# Altium PCB Final_Project.PcbDoc
Units mil, origin at the board's own origin, x right, y up, seen from the top; angles counter-clockwise.
Board outline 2702.01 x 2105 mil, 2 copper layers (Top Layer, Bottom Layer); 73 components, 55 nets, 229 pads, 105 vias.
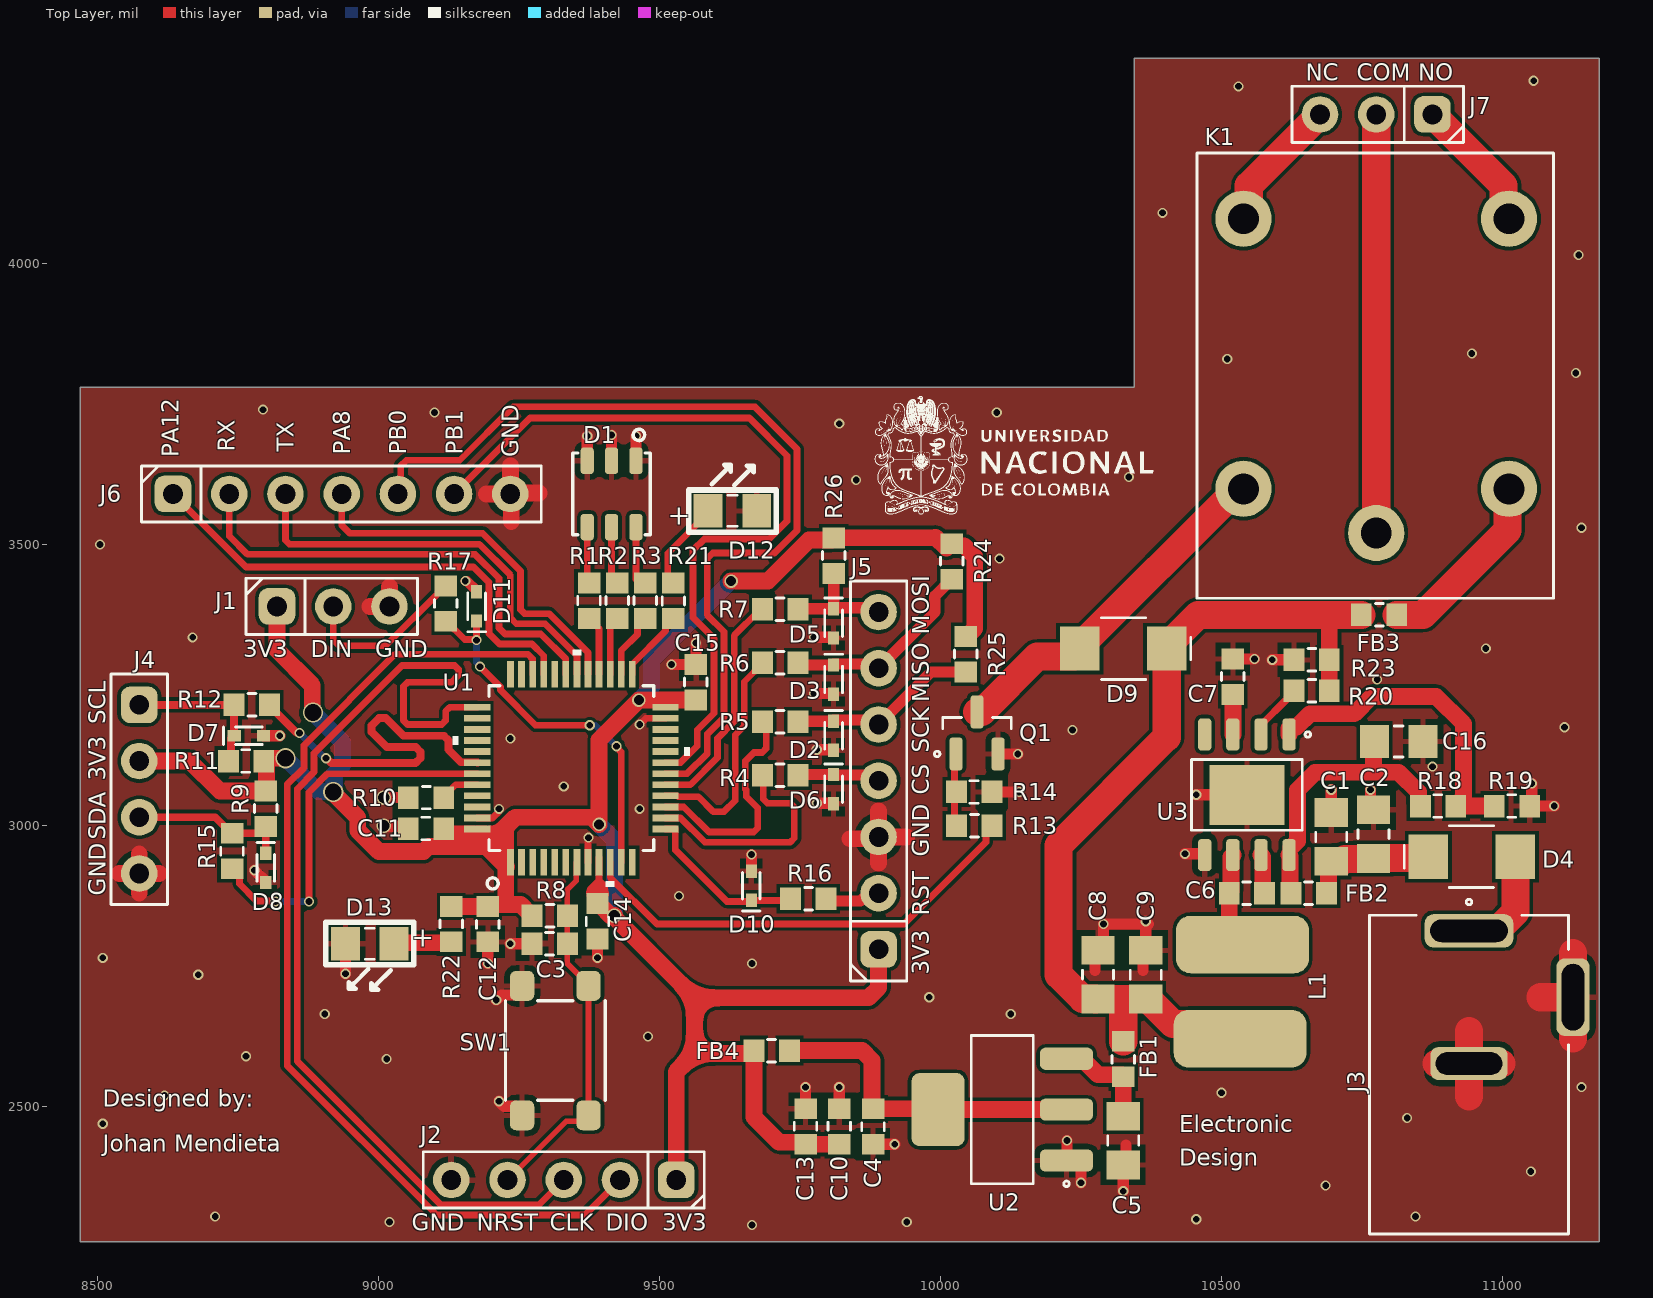
[diagram p0: Top Layer view]
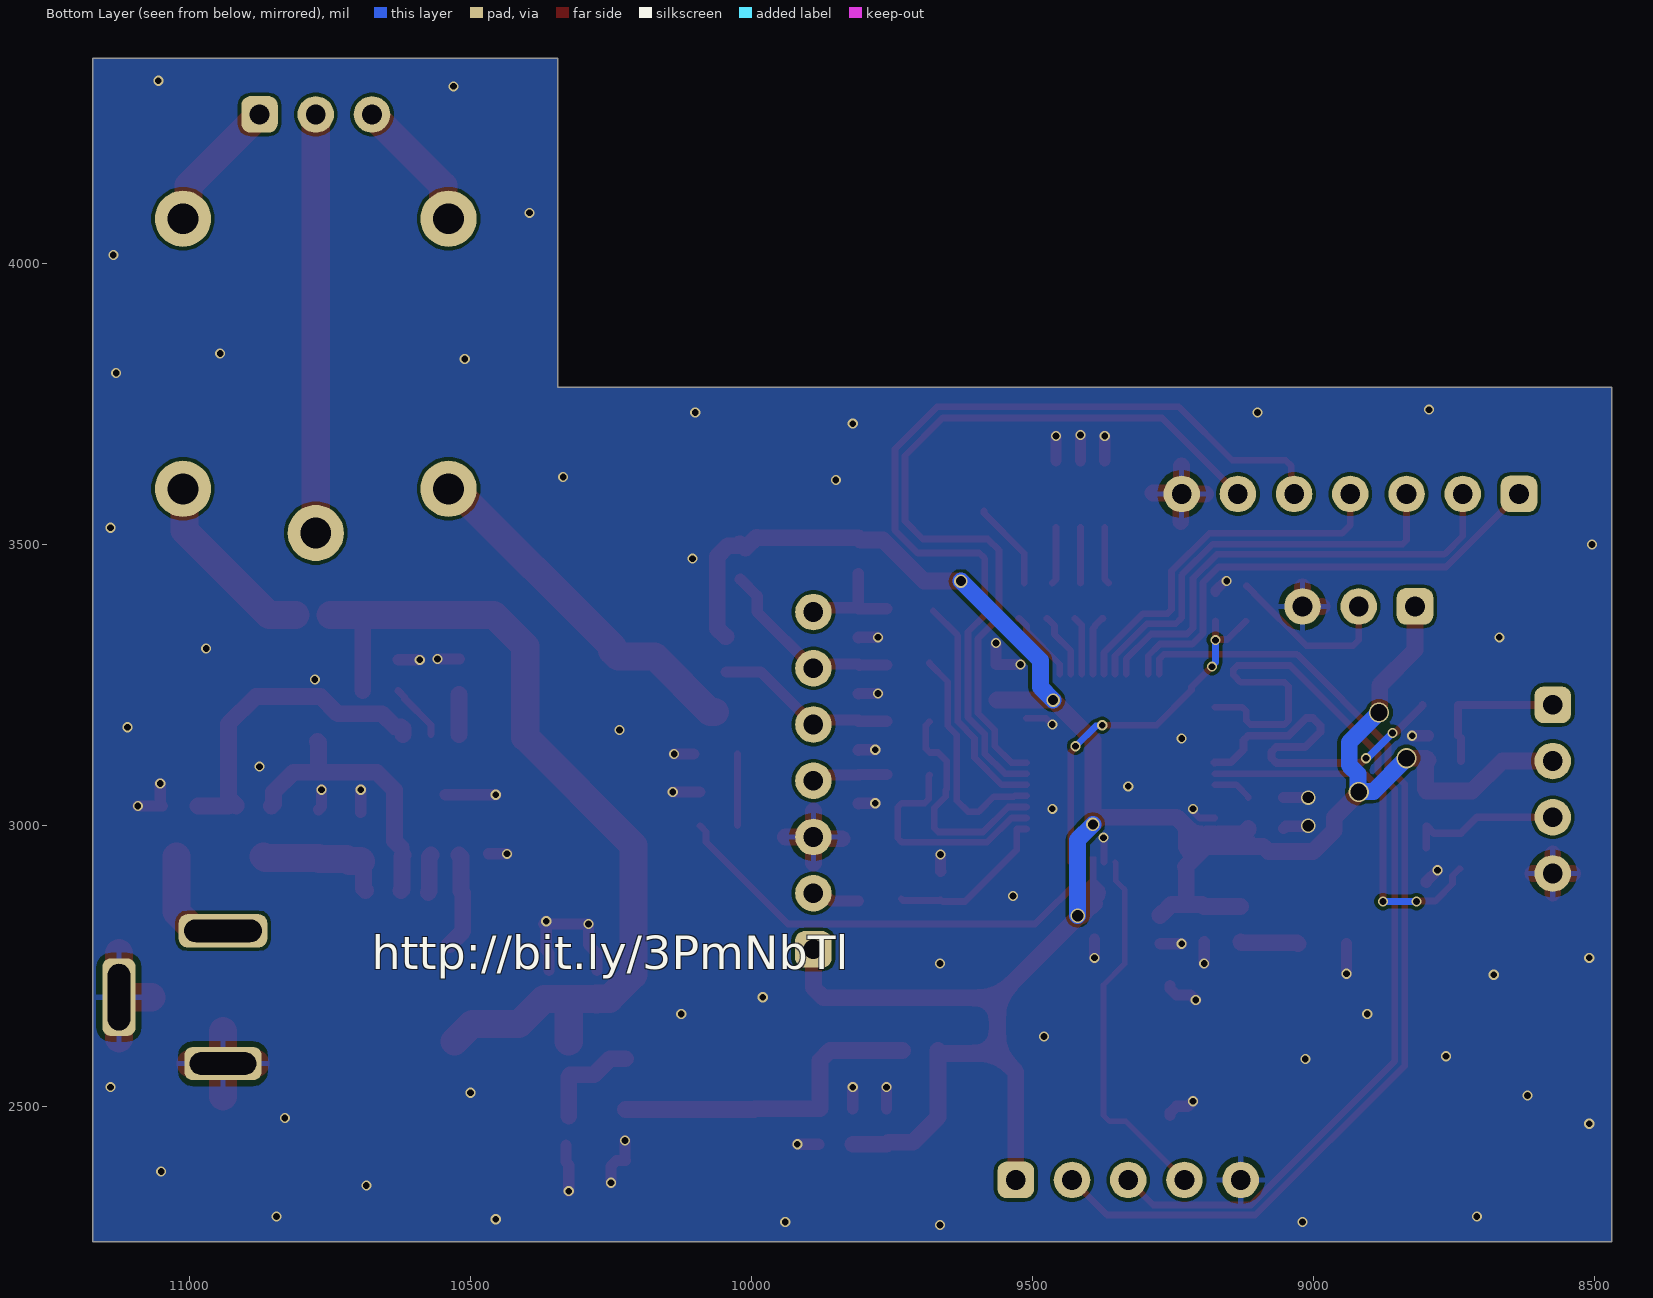
[diagram p1: Bottom Layer view, seen from below]
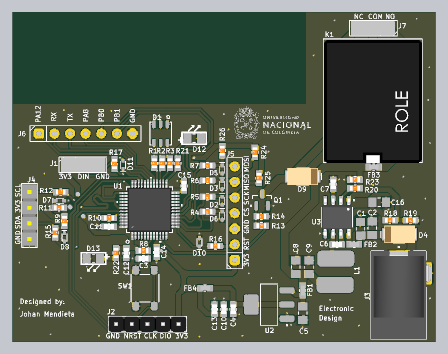
[diagram p2: 3D render of the assembled board from above, using the file's embedded part models]

## Layer stack, top to bottom
Top Solder: solder mask 0.4, Solder Resist, Dk 3.5
Top Layer: signal copper 1.4
Dielectric 1: dielectric 12.6, FR-4, Dk 4.8
Bottom Layer: signal copper 1.4
Bottom Solder: solder mask 0.4, Solder Resist, Dk 3.5

## Board outline
8470,2260 8470,3780 10345,3780 10345,4365 11172.01,4365 11172.01,2260

## Design rules (kind name [scope] priority, off if disabled: settings)
AcuteAngle [All] p1: minimum=7.00000000000000E+0001 checktracksonly=FALSE
Clearance [All] p1: gap=6 ignorepadtopadclearanceinfootprint=FALSE
HoleSize [All] p1: absolutevalues=TRUE maxlimit=200 minlimit=12 maxpercent=80.000 minpercent=20.000
MinimumSolderMaskSliver [All] p1: minsoldermaskwidth=4
PolygonConnect [All] p1: thpad.connectstyle=Relief thpad.reliefconductorwidth=10 thpad.reliefentries=4 thpad.polygonreliefangle="90 Angle" thpad.airgapwidth=10 smdpad.connectstyle=Relief smdpad.reliefconductorwidth=10 smdpad.reliefentries=4 smdpad.polygonreliefangle="90 Angle" smdpad.airgapwidth=10 via.connectstyle=Direct via.reliefconductorwidth=10 via.reliefentries=4 via.polygonreliefangle="90 Angle" via.airgapwidth=10
RoutingVias [All] p1: holewidth=12 width=18 viastyle="Through Hole" minholewidth=12 minwidth=18 maxholewidth=30 maxwidth=50
SilkToSilkClearance [All] p1: silktosilkclearance=2
SilkToSolderMaskClearance [IsPad] p1: minsilkscreentomaskgap=0.1 clearancetoexposedcopper=TRUE
SolderMaskExpansion [All] p1: expansion=2 istentingtop=FALSE
SupplyNets "Schematic Supply Nets_1" [InNet('12V')] p1: voltage=0.000
SupplyNets "Schematic Supply Nets_4" [InNet('GND')] p2: voltage=0.000
SupplyNets "Schematic Supply Nets_3" [InNet('3.3V_MCU')] p3: voltage=0.000
SupplyNets "Schematic Supply Nets_2" [InNet('3.3V')] p4: voltage=0.000
SupplyNets "Schematic Supply Nets" [InNet('5V')] p5: voltage=0.000
UnRoutedNet [All] p1: checkbadconnections=TRUE
Width Width_Filtered_Power [InNet('3.3V_MCU')] p1: maxlimit=100 minlimit=10 preferedwidth=30
Width Width_Power [InNet('VIN') or InNet('3.3V') or InNet('5V')] p2: maxlimit=100 minlimit=30 preferedwidth=30 minimp=50.000000 maximp=50.000000 favimp=50.000000
Width [All] p3: maxlimit=100 minlimit=6 preferedwidth=10
25 further rules are at their usual default settings.

## Components (designator, comment, footprint, x,y, rotation, side; value= is the part's Value field where it differs from the comment)
C1 "10uF 25V" 0805_cap 10695,2980 r90 top value=10uF
C2 "10uF 25V" 0805_cap 10770,2985 r90 top value=10uF
C3 "0.1uF 50V" 0603_cap 9305,2790 r180 top value=0.1uF
C4 "22uF 10V" 0603_cap 9880,2465 r270 top value=22uF
C5 "10uF 25V" 0805_cap 10325,2440 r270 top value=10uF
C6 "0.1uF 50V" 0603_cap 10545,2880 r180 top value=0.1uF
C7 "10uF 10V" 0603_cap 10520,3265 r90 top value=10uF
C8 "22uF 16V" 0805_cap 10280,2735 r90 top value=22uF
C9 "22uF 16V" 0805_cap 10365,2735 r90 top value=22uF
C10 "1uF 50V" 0603_cap 9820,2465 r90 top value=1uF
C11 "0.1uF 50V" 0603_cap 9085,2995 r180 top value=0.1uF
C12 "0.1uF 50V" 0603_cap 9195,2825 r270 top value=0.1uF
C13 "0.1uF 50V" 0603_cap 9760,2465 r90 top value=0.1uF
C14 "0.1uF 50V" 0603_cap 9390,2830 r270 top value=0.1uF
C15 "0.1uF 50V" 0603_cap 9565,3255 r90 top value=0.1uF
C16 "10uF 25V" 0805_cap 10815,3150 r0 top value=10uF
D1 "RGB" RGB_NS_3.5X3.7 9415,3590 r270 top
D2 "TVS_3V3_1CH_SOD_523" SOD_523 9810,3160 r270 top
D3 "TVS_3V3_1CH_SOD_523" SOD_523 9810,3260 r270 top
D4 "30V 3A" SMA 10945,2945 r0 top
D5 "TVS_3V3_1CH_SOD_523" SOD_523 9810,3360 r270 top
D6 "TVS_3V3_1CH_SOD_523" SOD_523 9810,3065 r270 top
D7 "TVS_3V3_1CH_SOD_523" SOD_523 8770,3160 r0 top
D8 "TVS_3V3_1CH_SOD_523" SOD_523 8800,2925 r270 top
D9 "30V 3A" SMA 10325,3315 r180 top
D10 "TVS_3V3_1CH_SOD_523" SOD_523 9663.54,2893.17 r90 top
D11 "TVS_3V3_1CH_SOD_523" SOD_523 9175,3390 r90 top
D12 "2V" 0805_LED 9630,3560 r0 top
D13 "2.9V" 0805_LED 8985,2790 r180 top
FB1 "60OHM 2A" 0603_fb 10325,2585 r270 top value="60 OHM"
FB2 "60OHM 2A" 0603_fb 10655,2880 r180 top value="60 OHM"
FB3 "60OHM 2A" 0603_fb 10780,3375 r0 top value="60 OHM"
FB4 "60OHM 2A" 0603_fb 9700,2600 r180 top value="60 OHM"
J1 "3x1" H_3X1_TH_100mil 8920,3390 r0 top
J2 "5x1" H_5x1_TH_100mil 9330,2370 r180 top
J3 "PWR JACK 2.1mm" CON_POWER_BARREL_2.1MM_3CONN 10940,2695 r0 top
J4 "4x1" H_4x1_TH_2.54mm 8575,3065 r270 top
J5 "7x1" H_7x1_TH_100mil 9890,3080 r90 top
J6 "7x1" H_7x1_TH_100mil 8935,3590 r0 top
J7 "3x1" H_3X1_TH_100mil 10775,4265 r180 top
K1 "V_15A" Relay_5V_15A 10775,3800 r90 top
L1 "2.2uH 4A" Ind_5.8*5.2_NS 10535,2705 r270 top value=2.2uH
Q1 "N CH" SOT_23_3 10065,3165 r90 top
R1 "330R 1/10W" 0603_res 9375,3400 r90 top value=330R
R2 "100R 1/10W" 0603_res 9425,3400 r90 top value=100R
R3 "100R 1/10W" 0603_res 9475,3400 r90 top value=100R
R4 "330R 1/10W" 0603_res 9715,3090 r180 top value=330R
R5 "330R 1/10W" 0603_res 9715,3185 r180 top value=330R
R6 "330R 1/10W" 0603_res 9715,3290 r180 top value=330R
R7 "330R 1/10W" 0603_res 9715,3385 r180 top value=330R
R8 "10k 1/10W" 0603_res 9305,2840 r0 top value=10k
R9 "4k7 1/10W" 0603_res 8800,3030 r90 top value=4k7
R10 "10k 1/10W" 0603_res 9085,3050 r0 top value=10k
R11 "4k7 1/10W" 0603_res 8765,3115 r180 top value=4k7
R12 "330R 1/10W" 0603_res 8775,3215 r0 top value=330R
R13 "1k 1/10W" 0603_res 10060,3000 r0 top value=1k
R14 "10k 1/10W" 0603_res 10060,3060 r180 top value=10k
R15 "330R 1/10W" 0603_res 8740,2955 r270 top value=330R
R16 "330R 1/10W" 0603_res 9765,2870 r0 top value=330R
R17 "330R 1/10W" 0603_res 9120,3395 r90 top value=330R
R18 "365k 1/10W" 0603_res 10885,3035 r180 top value=365k
R19 "191k 1/10W" 0603_res 11016.5,3035 r180 top value=191k
R20 "73k2 1/10W" 0603_res 10660,3240 r0 top value=73k2
R21 "330R 1/10W" 0603_res 9525,3400 r270 top value=330R
R22 "84R5 1/10W" 0603_res 9130,2825 r90 top value=84R5
R23 "10k 1/10W" 0603_res 10660,3295 r0 top value=10k
R24 "4k7 1/10W" 0603_res 10020,3470 r90 top value=4k7
R25 "4k7 1/10W" 0603_res 10045,3305 r90 top value=4k7
R26 "4k7 1/10W" 0603_res 9810,3480 r90 top value=4k7
SW1 "Sw" Sw_PUSH_4.5x4.5x5mm 9315,2600 r270 top
U1 "STM32F030C8T6TR" LQFP48_7x7mm 9343.58,3102.32 r90 top
U2 "AMS1117-3.3" SOT_223 10110,2495 r180 top
U3 "TPS56528DDAR" SOIC_8_3.9mm_EP 10545,3055 r270 top

## Footprints (in the part's own frame and the unit in brackets; to place one, negate y for a bottom-side part, rotate by r counter-clockwise, add the part's x,y. Pads: shape width x height; smd on the part's side, far side on the other; paste and mask are expansions set on the pad)
0603_cap [mil]
  rect 37x40 smd: 1(-31.5,0) 2(31.5,0)
  silkscreen extent -7,-20 8,20, body extent -31,-17 31,17, height 34
0603_fb [mil]
  rect 37x40 smd: 1(-31.5,0) 2(31.5,0)
  silkscreen extent -7,-20 8,20, body extent -32,-16 31,16, height 32
0603_res [mil] "1608 Metric / 20190225 / C-A.Serna.A"
  rect 37x40 smd: 1(-31.5,0) 2(31.5,0)
  silkscreen extent -7,-20 8,20, body extent -31,-16 32,16, height 12
0805_cap [mm]
  rect 1.3x1.5 smd: 1(-1.1,0) 2(1.1,0)
  silkscreen extent -0.2,-0.7 0.2,0.7, body extent -1.13,-0.7 1.07,0.7, height 1
0805_LED [mm]
  rect 1.3x1.5 smd: 1(-1.1,0) 2(1.1,0)
  silkscreen extent -1.98,-0.97 1.98,2.07, body extent -1,-0.62 1,0.63, height 1.1
CON_POWER_BARREL_2.1MM_3CONN [mm]
  rrect50% 4x1.5 hole 1.016 slot 3.5 at 0 deg: 1(0,3)
  rrect50% 3.5x1.5 hole 1.016 slot 3 at 0 deg: 2(0,-3)
  rrect50% 1.5x3.5 hole 1.016 slot 3 at 90 deg: 3(4.7,0)
  silkscreen extent -4.5,-10.7 4.5,4.42, body extent -4.5,-10.7 4.9,3.7, height 11
H_3X1_TH_100mil [mil]
  rrect50% 65x65 hole 35: 1(-100,0)
  round 65 hole 35: 2(0,0) 3(100,0)
  silkscreen extent -155,-50 150,50, body extent -142,-46 142,46, height 320
H_4x1_TH_2.54mm [mil]
  rrect50% 65x65 hole 35: 1(-150,0)
  round 65 hole 35: 2(-50,0) 3(50,0) 4(150,0)
  silkscreen extent -205,-50 205,50, body extent -200,-50 205,50, height 420
H_5x1_TH_100mil [mil]
  rrect50% 65x65 hole 35: 1(-200,0)
  round 65 hole 35: 2(-100,0) 3(0,0) 4(100,0) 5(200,0)
  silkscreen extent -250,-50 250,50, body extent -250,-49 250,49, height 335
H_7x1_TH_100mil [mil]
  rrect50% 65x65 hole 35: 1(-300,0)
  round 65 hole 35: 2(-200,0) 3(-100,0) 4(0,0) 5(100,0) 6(200,0) 7(300,0)
  silkscreen extent -356,-50 355,50
Ind_5.8*5.2_NS [mm]
  rrect50% 2.6x6 smd: 1(-2.125,0.053) 2(2.125,-0.053)
  body extent -3,-2.75 3,2.75, height 4.5
LQFP48_7x7mm [mil]
  rect 47x12 smd paste+0 mask+1.8: 1(-167.32,108.27) 2(-167.32,88.58) 3(-167.32,68.9) 4(-167.32,49.21) 5(-167.32,29.53) 6(-167.32,9.84) 7(-167.32,-9.84) 8(-167.32,-29.53) 9(-167.32,-49.21) 10(-167.32,-68.9) 11(-167.32,-88.58) 12(-167.32,-108.27) 25(167.32,-108.27) 26(167.32,-88.58) 27(167.32,-68.9) 28(167.32,-49.21) 29(167.32,-29.53) 30(167.32,-9.84) 31(167.32,9.84) 32(167.32,29.53) 33(167.32,49.21) 34(167.32,68.9) 35(167.32,88.58) 36(167.32,108.27)
  rect 12x47 smd paste+0 mask+1.8: 13(-108.27,-167.32) 14(-88.58,-167.32) 15(-68.9,-167.32) 16(-49.21,-167.32) 17(-29.53,-167.32) 18(-9.84,-167.32) 19(9.84,-167.32) 20(29.53,-167.32) 21(49.21,-167.32) 22(68.9,-167.32) 23(88.58,-167.32) 24(108.27,-167.32) 37(108.27,167.32) 38(88.58,167.32) 39(68.9,167.32) 40(49.21,167.32) 41(29.53,167.32) 42(9.84,167.32) 43(-9.84,167.32) 44(-29.53,167.32) 45(-49.21,167.32) 46(-68.9,167.32) 47(-88.58,167.32) 48(-108.27,167.32)
  silkscreen extent -215,-211 211,211, body extent -177,-177 177,177, height 63
Relay_5V_15A [mm]
  round 2.54 hole 1.397: 1(-7.1,0) 2(-5.1,-6) 3(7.1,-6) 4(7.1,6) 5(-5.1,6)
  silkscreen extent -10.04,-8.01 10.07,8.1, body extent -10.1,-8 9.9,8, height 15.02
RGB_NS_3.5X3.7 [mm]
  rrect50% 1.2x0.6 smd: 1(-1.5,1.1) 2(-1.5,0) 3(-1.5,-1.1) 4(1.5,-1.1) 5(1.5,0) 6(1.5,1.1)
  silkscreen extent -2.92,-1.75 1.85,1.75, body extent -1.85,-1.74 1.85,1.75, height 1
SMA [mm]
  rect 1.8x2 smd: 1(-1.965,0) 2(1.965,0)
  silkscreen extent -3.05,-1.4 0.98,1.4, body extent -2.64,-1.4 2.64,1.4, height 2.34
SOD_523 [mm]
  rect 0.6x0.5 smd: 1(-0.66,0) 2(0.66,0)
  silkscreen extent -1.14,-0.4 0.6,0.4, body extent -0.6,-0.4 0.6,0.4, height 0.6
SOIC_8_3.9mm_EP [mm]
  rrect50% 1.45x0.6 smd: 1(-2.725,1.905) 2(-2.725,0.635) 3(-2.725,-0.635) 4(-2.725,-1.905) 5(2.725,-1.905) 6(2.725,-0.635) 7(2.725,0.635) 8(2.725,1.905)
  rect 2.71x3.4 smd: 9(0,0)
  silkscreen extent -2.85,-2.5 1.6,2.88, body extent -3,-2.45 3,2.45, height 1.7
SOT_23_3 [mm]
  rrect50% 1.5x0.6 smd: 1(-0.95,0.95) 2(-0.95,-0.95) 3(0.95,0)
  silkscreen extent -1.07,-1.55 0.7,1.92, body extent -0.7,-1.52 0.7,1.53, height 1.12
SOT_223 [mm]
  rrect50% 2.4x1 smd: 1(-2.9,2.3) 2(-2.9,0) 3(-2.9,-2.3)
  rrect30% 2.4x3.3 smd: 4(2.9,0)
  silkscreen extent -3.03,-3.35 1.4,3.47, body extent -1.86,-3.35 1.86,3.35, height 1.8
Sw_PUSH_4.5x4.5x5mm [mm]
  rrect50% 1.35x1.1 smd: 1(-2.925,1.5) 1(2.925,1.5) 2(-2.925,-1.5) 2(2.925,-1.5)
  silkscreen extent -2.25,-2.25 2.25,2.25, body extent -2.25,-2.25 2.25,2.25, height 5

## Part data
C1 C2 C5 C16: library part Cap_10uF_0805_25V_, "25V 10uF X5R ±10% 0805 Multilayer Ceramic Capacitors MLCC - SMD/SMT ROHS", Manufacturer="Samsung Electro-Mechanics", Manufacturer Part Number=CL21A106KAYNNNE, Supplier Part Number 1=C15850, ComponentLink1Description=LCSC, ComponentLink1URL=https://lcsc.com/product-detail/Multilayer-Ceramic-Capacitors-MLCC-SMD-SMT_Samsung-Electro-Mechanics-CL21A106KAYNNNE_C15850.html, Supplier 1=LCSC
C3 C6 C11 C12 C13 C14 C15: library part Cap_0.1uF_0603_50V, "50V 100nF Y5V -20%~+80% 0603 Multilayer Ceramic Capacitors MLCC - SMD/SMT ROHS", Manufacturer="Walsin Tech Corp", Manufacturer Part Number=0603F104Z500CT, Supplier Part Number 1=C83060, ComponentLink1Description=LCSC, ComponentLink1URL=https://www.lcsc.com/product-detail/Multilayer-Ceramic-Capacitors-MLCC-SMD-SMT_Walsin-Tech-Corp-0603F104Z500CT_C83060.html, Supplier 1=LCSC
C4: library part Cap_22uF_0603_10V, "10V 22uF X5R ±20% 0603 Multilayer Ceramic Capacitors MLCC - SMD/SMT ROHS", Manufacturer=HRE, Manufacturer Part Number=CGA0603X5R226M100JT, Supplier Part Number 1=C6119863, ComponentLink1Description=LCSC, ComponentLink1URL=https://lcsc.com/product-detail/Multilayer-Ceramic-Capacitors-MLCC-SMD-SMT_HRE-CGA0603X5R226M100JT_C6119863.html, Supplier 1=LCSC
C7: library part Cap_10uF_0603_10V, "10V 10uF X5R ±10% 0603 Multilayer Ceramic Capacitors MLCC - SMD/SMT ROHS", Manufacturer=CCTC, Manufacturer Part Number=TCC0603X5R106K100CT, Supplier Part Number 1=C380314, ComponentLink1Description=LCSC, ComponentLink1URL=https://www.lcsc.com/product-detail/Multilayer-Ceramic-Capacitors-MLCC-SMD-SMT_CCTC-TCC0603X5R106K100CT_C380314.html, Supplier 1=LCSC
C8 C9: library part Cap_22uF_0805_16V, "16V 22uF X5R ±20% 0805 Multilayer Ceramic Capacitors MLCC - SMD/SMT ROHS", Manufacturer=Chinocera, Manufacturer Part Number=HGC0805R5226M160NSLJ, Supplier Part Number 1=C33546008, ComponentLink1Description=LCSC, ComponentLink1URL=https://lcsc.com/product-detail/Multilayer-Ceramic-Capacitors-MLCC-SMD-SMT_Chinocera-HGC0805R5226M160NSLJ_C33546008.html, Supplier 1=LCSC
C10: library part Cap_1uF_0603_50V, "50V 1uF X5R ±10% 0603 Multilayer Ceramic Capacitors MLCC - SMD/SMT ROHS", Manufacturer="Samsung Electro-Mechanics", Manufacturer Part Number=CL10A105KB8NNNC, Supplier Part Number 1=C15849, ComponentLink1Description=LCSC, ComponentLink1URL=https://www.lcsc.com/product-detail/Multilayer-Ceramic-Capacitors-MLCC-SMD-SMT_Samsung-Electro-Mechanics-CL10A105KB8NNNC_C15849.html, Supplier 1=LCSC
D1: library part LED_RGB_3535_SMD, "-30℃~+85℃ RGB 110° 3535(mm) Light Emitting Diodes (LED) ROHS", Manufacturer="Foshan NationStar Optoelectronics", Manufacturer Part Number=RS-3535MWAM, Supplier Part Number 1=C842778, ComponentLink1Description=LCSC, ComponentLink1URL=https://www.lcsc.com/product-detail/Light-Emitting-Diodes-LED_Foshan-NationStar-Optoelectronics-RS-3535MWAM_C842778.html, Supplier 1=LCSC
D2 D3 D5 D6 D7 D8 D10 D11: "11.2A@8/20us 200W@8/20us 14.1V 5V Unidirectional 3.3V SOD-523 ESD and Surge Protection (TVS/ESD) ROHS", Manufacturer=LRC, Manufacturer Part Number=LESD5Z3.3T1G, Supplier Part Number 1=C136161, ComponentLink1Description=LCSC, ComponentLink1URL=https://lcsc.com/product-detail/ESD-and-Surge-Protection-TVS-ESD_LRC-LESD5Z3-3T1G_C136161.html, Supplier 1=LCSC
D4 D9: library part D_Schottky_40V_3A_SMA, "40V Independent 3A 550mV@3A SMA Schottky Diodes ROHS", Manufacturer=TDSEMIC, Manufacturer Part Number=SS34-TD, Supplier Part Number 1=C46550832, ComponentLink1Description=LCSC, ComponentLink1URL=https://lcsc.com/product-detail/Schottky-Diodes_TDSEMIC-SS34-TD_C46550832.html, Supplier 1=LCSC
D12: library part LED_0805_RED, "LED RED CLEAR 0805 SMD", Manufacturer=XINGLIGHT, Manufacturer Part Number=XL-2012SURC, Supplier Part Number 1=C965812, ComponentLink1Description=LCSC, ComponentLink1URL=https://www.lcsc.com/product-detail/Light-Emitting-Diodes-LED_XINGLIGHT-XL-2012SURC_C965812.html, Supplier 1=LCSC
D13: library part LED_0805_Green, "LED GREEN CLEAR 0805 SMD", Manufacturer=XINGLIGHT, Manufacturer Part Number=XL-2012UGC, Supplier Part Number 1=C965815, ComponentLink1Description=LCSC, ComponentLink1URL=https://www.lcsc.com/product-detail/Light-Emitting-Diodes-LED_XINGLIGHT-XL-2012UGC_C965815.html, Supplier 1=LCSC
FB1 FB2 FB3 FB4: library part FB_60_0603_2A, "2A 1 100mΩ 60Ω@100MHz ±25% 0603 Ferrite Beads ROHS", Manufacturer=TAI-TECH, Manufacturer Part Number=HCB1608KF-600T20, Supplier Part Number 1=C369516, ComponentLink1Description=LCSC, ComponentLink1URL=https://www.lcsc.com/product-detail/Ferrite-Beads_TAI-TECH-HCB1608KF-600T20_C369516.html, Supplier 1=LCSC
J1 J7: library part H_Male_3x1_TH_100mil, "H_Male_3x1_TH_100mil", ComponentLink1Description=LCSC
J2: library part H_Male_5x1_TH_100mil, "H_Male_5x1_TH_100mil", ComponentLink1Description=LCSC
J3: library part Con_Power_Jack_2.1mm_3pins, "CONN PWR JACK 2X5.5MM SOLDER", Manufacturer=HCTL, Manufacturer Part Number=HC-DC-005-2.0T, Supplier Part Number 1=C3010533, ComponentLink1Description=LCSC, ComponentLink1URL=https://www.lcsc.com/product-detail/AC-DC-Power-Connectors_HCTL-HC-DC-005-2-0T_C3010533.html, Supplier 1=LCSC
J4: library part H_Male_4x1_TH_100mil, "H_Male_4x1_TH_100mil", ComponentLink1Description=LCSC
J5 J6: library part H_Male_7x1_TH_100mil, "H_Male_7x1_TH_100mil", ComponentLink1Description=LCSC
K1: library part Relay_5V_15A, "250V@AC 5V 15A 1 Form C: 1C (SPDT-CO) Plugin,15.6x19.2mm Power Relays ROHS", Manufacturer="Ningbo Songle Relay", Manufacturer Part Number=SRD-05VDC-SL-C, Supplier Part Number 1=C35449, ComponentLink1Description=LCSC, ComponentLink1URL=https://lcsc.com/product-detail/Power-Relays_Ningbo-Songle-Relay-SRD-05VDC-SL-C_C35449.html, Supplier 1=LCSC
L1: library part Inductor_2.2uH_4A_5.8*5.2mm, "4A 2.2uH ±20% 22.1mΩ SMD,5.8x5.2mm Inductors (SMD) ROHS", Manufacturer="SHOU HAN", Manufacturer Part Number=CY54-2.2UH, Supplier Part Number 1=C2929427, ComponentLink1Description=LCSC, ComponentLink1URL=https://lcsc.com/product-detail/Inductors-SMD_SHOU-HAN-CY54-2-2UH_C2929427.html, Supplier 1=LCSC
Q1: library part Q_NFET_20V_3.2A_SOT23, "MOSFET N-CH 20V SOT23", Manufacturer=Doeshare, Manufacturer Part Number=DN2302S, Supplier Part Number 1=C2931750, ComponentLink1Description=LCSC, ComponentLink1URL=https://www.lcsc.com/product-detail/MOSFETs_Doeshare-DN2302S_C2931750.html, Supplier 1=LCSC
R1 R4 R5 R6 R7 R12 R15 R16 R17 R21: library part Res_330R_0603_1/10W, "RES SMD 330R OHM 5% 1/10W 0603", Manufacturer=FOJAN, Manufacturer Part Number="FRC0603J331 TS", Supplier Part Number 1=C2907152, ComponentLink1Description=LCSC, ComponentLink1URL=https://www.lcsc.com/product-detail/Chip-Resistor-Surface-Mount_FOJAN-FRC0603J331-TS_C2907152.html, Supplier 1=LCSC
R2 R3: library part Res_100R_0603_1/10W, "RES SMD 100R OHM 5% 1/10W 0603", Manufacturer=FOJAN, Manufacturer Part Number="FRC0603J101 TS", Supplier Part Number 1=C2907089, ComponentLink1Description=LCSC, ComponentLink1URL=https://www.lcsc.com/product-detail/Chip-Resistor-Surface-Mount_FOJAN-FRC0603J101-TS_C2907089.html, Supplier 1=LCSC
R8 R10 R14 R23: library part Res_10k_0603_1/10W, "RES SMD 10k OHM 5% 1/10W 0603", Manufacturer=FOJAN, Manufacturer Part Number=FRC0603J103TS, Supplier Part Number 1=C2930027, ComponentLink1Description=LCSC, ComponentLink1URL=https://www.lcsc.com/product-detail/Chip-Resistor-Surface-Mount_FOJAN-FRC0603J103TS_C2930027.html, Supplier 1=LCSC
R9 R11 R24 R25 R26: library part Res_4k7_0603_1/10W, "100mW Thick Film Resistor 75V ±1% 4.7kΩ 0603 Chip Resistor - Surface Mount ROHS", Manufacturer=VO, Manufacturer Part Number=SCR0603F4K7, Supplier Part Number 1=C3016318, ComponentLink1Description=LCSC, ComponentLink1URL=https://lcsc.com/product-detail/Chip-Resistor-Surface-Mount_VO-SCR0603F4K7_C3016318.html, Supplier 1=LCSC
R13: library part Res_1k_0603_1/10W, "RES SMD 1k OHM 5% 1/10W 0603", Manufacturer=FOJAN, Manufacturer Part Number="FRC0603J102 TS", Supplier Part Number 1=C2907113, ComponentLink1Description=LCSC, ComponentLink1URL=https://www.lcsc.com/product-detail/Chip-Resistor-Surface-Mount_FOJAN-FRC0603J102-TS_C2907113.html, Supplier 1=LCSC
R18: library part Res_365k_0603_1/10W, "100mW Thick Film Resistor 75V ±100ppm/℃ ±1% 365kΩ 0603 Chip Resistor - Surface Mount ROHS", Manufacturer=YAGEO, Manufacturer Part Number=RC0603FR-07365KL, Supplier Part Number 1=C185336, ComponentLink1Description=LCSC, ComponentLink1URL=https://lcsc.com/product-detail/Chip-Resistor-Surface-Mount_YAGEO-RC0603FR-07365KL_C185336.html, Supplier 1=LCSC
R19: library part Res_191k_0603_1/10W, "100mW Thick Film Resistor 75V ±100ppm/℃ ±1% 191kΩ 0603 Chip Resistor - Surface Mount ROHS", Manufacturer=YAGEO, Manufacturer Part Number=AC0603FR-07191KL, Supplier Part Number 1=C227635, ComponentLink1Description=LCSC, ComponentLink1URL=https://lcsc.com/product-detail/Chip-Resistor-Surface-Mount_YAGEO-AC0603FR-07191KL_C227635.html, Supplier 1=LCSC
R20: library part Res_73k2_0603_1/10W, "100mW Thick Film Resistor 75V ±100ppm/℃ ±1% 73.2kΩ 0603 Chip Resistor - Surface Mount ROHS", Manufacturer=YAGEO, Manufacturer Part Number=RC0603FR-0773K2L, Supplier Part Number 1=C163420, ComponentLink1Description=LCSC, ComponentLink1URL=https://lcsc.com/product-detail/Chip-Resistor-Surface-Mount_YAGEO-RC0603FR-0773K2L_C163420.html, Supplier 1=LCSC
R22: library part Res_84R5_0603_1/10W, "100mW Thick Film Resistor 50V ±100ppm/℃ ±1% 84.5Ω 0603 Chip Resistor - Surface Mount ROHS", Manufacturer="LIZ Elec", Manufacturer Part Number=CR0603FA84R5G, Supplier Part Number 1=C101216, ComponentLink1Description=LCSC, ComponentLink1URL=https://lcsc.com/product-detail/Chip-Resistor-Surface-Mount_LIZ-Elec-CR0603FA84R5G_C101216.html, Supplier 1=LCSC
SW1: library part Sw_PUSH_4.5x4.5x5.0xmm, "SWITCH TACTILE SPST-NO 0.05A 12V", Manufacturer=BZCN, Manufacturer Part Number=TSC015A05026A, Supplier Part Number 1=C2888509, ComponentLink1Description=LCSC, ComponentLink1URL=https://www.lcsc.com/product-detail/Tactile-Switches_BZCN-TSC015A05026A_C2888509.html, Last modified by=N-A.Potosi, Last modified date=20190222, Supplier 1=LCSC
U1: library part IC_STM32F030C8T6TR_LQFP48_7x7MM, "IC MCU 32BIT 64KB FLASH 48LQFP", Manufacturer=STMicroelectronics, Supplier Part Number 1=C23922, ComponentLink1Description=LCSC, ComponentLink1URL=https://www.lcsc.com/product-detail/ST-Microelectronics_STMicroelectronics-STM32F030C8T6_C23922.html, Manufacturer Part Number=STM32F030C8T6TR, Supplier 1=LCSC
U2: library part LDO_3V3_1A_FIXED, "1A 60dB@(120Hz) Fixed 3.3V Positive 18V SOT-223 Linear Voltage Regulators (LDO) ROHS", Manufacturer="UMW(Youtai Semiconductor Co., Ltd.)", Supplier Part Number 1=C347222, ComponentLink1Description=LCSC, ComponentLink1URL=https://www.lcsc.com/product-detail/_UMW-Youtai-Semiconductor-Co-Ltd-_C347222.html, Manufacturer Part Number=AMS1117-3.3, Supplier 1=LCSC
U3: library part DCDC_SW_BUCK_5A_SOIC8, "IC REG BUCK ADJ 5A 8SOPWR", Manufacturer="Texas Instruments", Supplier Part Number 1=C138716, ComponentLink1Description=LCSC, ComponentLink1URL=https://lcsc.com/product-detail/DC-DC-Converters_Texas-Instruments-TPS56528DDAR_C138716.html, Manufacturer Part Number=TPS56528DDAR, Supplier 1=LCSC

## Via types
v1: diameter 18, hole 12, Top Layer to Bottom Layer, tented both sides, 96 vias
v2: diameter 24, hole 18, Top Layer to Bottom Layer, tented both sides, 3 vias
v3: diameter 26, hole 20, Top Layer to Bottom Layer, tented both sides, 3 vias
v4: diameter 36, hole 30, Top Layer to Bottom Layer, tented both sides, 3 vias

## Nets (pads, with @x,y where several pads share a name; then routed paths per layer and width w, separated by ;. In a path a pad name is that pad's centre, name@x,y a point inside that pad or via, vN(x,y) a via of type N, cw(c..) or ccw(c..) an arc to the next point about the centre after c; other vN are vias at no path point)
3.3V: C4.1 FB4.1 U2.2 U2.4 | length 585
  Top Layer w30: FB4.1 9860.93,2600 9878.5,2582.43 C4.1@9878.5,2496.5 ; C4.1 9994.33,2496.5 U2.4 U2.2
3.3V_MCU: C10.1 C11.1 C12.1 C13.1 C14.1 C15.1 FB4.2 J1.1 J2.1 J4.2 J5.1 R8.1 R9.2 R11.1 R22.2 R24.2 R25.2 R26.2 U1.1 U1.9 U1.24 U1.48 | length 4601.5
  Top Layer w12: U1.48 9191.74,2994.06 9191.74,2978.58
  Top Layer w30: J4.2 8664.74,3115 8718.24,3061.5 R9.2 ; R11.1@8796.5,3116.5 8800,3120 v4(8835,3120) ; R9.2@8801.5,3065 R11.1@8801.5,3116.5 ; J1.1 8820,3312.5 8882.7,3249.8 8882.7,3202.43 v4(8883.85,3201.28) ; v4(8920,3060) 8920,3058.38 8963.57,3014.8 8963.57,2991.43 9001,2954 9080.7,2954 9089.85,2963.15 9191.85,2963.15 ; C11.1 9116.5,2993.5 9120,2990 9121.5,2990 9126.5,2985 9170,2985 9191.85,2963.15 ; R22.2 C12.1 9198.5,2860 9225.03,2860 ; R8.1 9273.5,2841.5 9270,2845 9268.5,2845 9253.5,2860 9225.03,2860 ; C14.1 9393.5,2858 9395,2858 9414,2839 9419,2839 v3(9420,2840) 9420,2836.7 9562.57,2694.12 ; J2.1 9530,2562.43 9562.57,2595 ; C15.1@9563.5,3223.5 v2(9463.5,3223.5) 9392.8,3152.8 v2(9392.8,3002.2) 9380,3015 9243.7,3015 9191.85,2963.15 ; v2(9627.57,3435) 9693.18,3435 9766.18,3508 9806.5,3508 R26.2 9810.75,3512.25 9989.25,3512.25 9990,3513 9991.5,3513 R24.2@10010.75,3493.75 ; FB4.2 FB4.2@9668.5,2598.5 ; C10.1 C13.1 9756.5,2437 9713,2437 9668.5,2481.5 FB4.2@9668.5,2598.5 ; J5.1 9890,2711.7 9872.43,2694.12 9562.57,2694.12 ; R24.2@10021.5,3501.5 R24.2 10023.5,3498 10042,3498 10061,3479 10061,3351 10046.5,3336.5 R25.2 ; 9191.85,2963.15 9228,2927 9227.32,2927 9226.82,2926.5 9226.82,2861.8 9225.03,2860 ; 9562.57,2595 9665,2595 FB4.2@9668.5,2598.5 ; 9562.57,2595 9562.57,2694.12
  Bottom Layer w30: v4(8835,3120) 8893.85,3061.15 8918.85,3061.15 v4(8920,3060) 8921.15,3061.15 8921.15,3091.72 8937,3107.57 8937,3148.13 v4(8883.85,3201.28) ; v2(9392.8,3002.2) 9420,2975 v3(9420,2840) ; v2(9463.5,3223.5) 9486.29,3246.29 9486.29,3293.71 v2(9627.57,3435)
5V: C8.1 C9.1 D9.1 FB1.1 FB3.1 L1.2 R20.2 R23.2 | length 1612.3
  Top Layer w30: 10655,3375 10658.5,3371.5 ; 10690,3375 10691.5,3373.5 R23.2 R20.2
  Top Layer w50: C8.1@10275.47,2691.1 10275.47,2692.28 10252.72,2692.28 10210,2735 10210,2965 10402.36,3157.36 10402.36,3318.94 10458.43,3375 10655,3375 10690,3375 FB3.1 ; C8.1 10325,2691.69 ; FB1.1 10325,2691.69 ; L1.2@10528.06,2616.5 10497.4,2647.16 10413.48,2647.16 10368.94,2691.69 C9.1 10325,2691.69
12V: C1.1 C2.1 D4.1 FB2.1 | length 235.2
  Top Layer w30: FB2.1@10686.5,2885 10690,2888.5 C1.1@10690,2942.72
  Top Layer w50: C1.1 10695.59,2937.28 10715.35,2937.28 10719.17,2941.1 10769.41,2941.1 10770.59,2942.28 10864.92,2942.28 D4.1
COM: J7.2 K1.1 | length 744.5
  Top Layer w50: K1.1 10775,3570 J7.2
GND: C1.2 C2.2 C3.2 C4.2 C5.2 C7.2 C8.2 C9.2 C10.2 C11.2 C12.2 C13.2 C14.2 C15.2 C16.2 D1.1 D1.2 D1.3 D2.2 D3.2 D5.2 D6.2 D7.2 D8.2 D10.2 D11.2 D12.2 D13.2 J1.3 J2.5 J3.2 J3.3 J4.4 J5.3 J6.7 Q1.2 R10.1 R14.1 R19.1 R23.1 SW1.2 U1.8 U1.23 U1.47 U2.1 U3.5 U3.9 | length 2985.7
  Top Layer w12: U1.47 9203.05,3013.74 9213.85,3024.55 9213.85,3028.85 v1(9215,3030) ; U1.8 9373.11,2978.11 v1(9373.79,2978.79) ; v1(9465,3180) 9475.91,3190.91 U1.23 ; U3.5@10467.72,2950 U3.5
  Top Layer w18: v1(9155,3435) 9157.95,3435 9175,3417.95 D11.2
  Top Layer w20: v1(8780.16,2920.83) 8780.16,2920.51 8800,2900.67 D8.2 ; D7.2 v1(8825,3160) ; v1(8941.69,2736.69) D13.2 ; v3(9010,3000) 9011.15,2998.85 9049.65,2998.85 C11.2 ; v3(9010,3050) R10.1 ; v1(9195,2755) C12.2 ; v1(9210,2690) 9219.09,2699.09 9244.35,2699.09 9255.94,2710.68 SW1.2@9255.94,2715.16 ; v1(9215,2510) 9224.09,2500.91 9244.35,2500.91 9255.94,2489.32 SW1.2@9255.94,2484.84 ; v1(9235,2790) C3.2 ; D1.3 v1(9371.69,3693.31) ; v1(9390,2765) C14.2 ; D1.2 v1(9415,3695) ; D1.1 v1(9458.31,3693.31) ; v1(9521.5,3286.5) C15.2 v1(9565,3325) ; D10.2 9663.7,2919.32 v1(9663.7,2948.7) ; C13.2 v1(9760,2535) ; v1(9775,3235) 9809.84,3235 9810,3234.84 D3.2 ; v1(9775,3335) 9809.84,3335 9810,3334.84 D5.2 ; v1(9780,3040) 9809.84,3040 9810,3039.84 D6.2 ; v1(9780,3135) 9809.84,3135 9810,3134.84 D2.2 ; C10.2 v1(9820,2535) ; C4.2 v1(9918.5,2433.5) ; R14.1 v1(10140,3060) ; Q1.2 v1(10137.6,3127.6) ; v1(10225,2440) 10225,2405.28 U2.1 10240.31,2404.45 10250,2394.76 v1(10250,2365) ; 10275,2742.72 10275,2773.31 C8.2 10290,2788.31 v1(10290,2825) 10360,2825 v1(10365,2830) ; v1(10325,2350) C5.2 10330,2401.69 10330,2432.28 ; 10360,2742.72 10360,2773.31 C9.2 v1(10365,2830) ; v1@10370,2825 v1(10365,2830) ; v1(10435,2950) U3.5@10467.72,2950 ; v1(10455,3055) U3.9 ; C7.2 v1(10558.5,3296.5) ; v1(10590,3295) R23.1 ; C1.2 v1(10695,3064) ; v1(10765,3064) 10765,3033.31 C2.2 ; v1(11051.5,3075) 11051.5,3038.5 R19.1 v1(11091.5,3035)
  Top Layer w30: 8540,2915 J4.4 ; 8575,2880 J4.4 ; 8575,2950 J4.4 ; 8610,2915 J4.4 ; 8985,3390 J1.3 9020,3425 ; 9192.5,3590 J6.7 9235,3640 ; J6.7@9236.24,3591.47 9286.24,3591.47 ; 9236.59,3541.12 J6.7@9236.59,3591.12 ; 9838.56,2976.71 J5.3@9888.56,2976.71 ; 9890,2933.5 J5.3 ; 9890,3026.5 J5.3 ; 9940,2980 J5.3
  Top Layer w50: J3.2@10881.89,2576.89 J3.2 ; 10940,2518.78 J3.2 ; 10940,2635 J3.2 ; J3.2@10998.11,2576.89 J3.2 ; 11066.93,2695 J3.3 ; 11125,2621.89 J3.3@11125,2680 ; J3.3@11125,2715 11125,2773.11
  other v1: 9665,2290 9020,2295 9940,2295 10455,2300 8710,2305 10845,2305 10685,2360 11050,2385 8510,2470 10830,2480 8620,2520 10500,2525 11140,2535 9015,2585 8765,2590 9480,2625 8905,2665 10125,2665 9980,2695 8680,2735 9665,2755 8510,2765 9535,2875 9465,3030 9330,3070 10875,3105 9235,3155 10235,3170 11110,3175 10776.64,3260 10970,3315 8670,3335 10105,3475 8505,3500 11140,3530 9850,3615 10335,3620 9820,3715 9100,3735 10100,3735 8795,3740 11130,3805 10510,3830 10945,3840 11135,4015 10395,4090 10530,4315 11055,4325
I2C_SCL: D7.1 J4.1 R11.2 R12.1 | length 272.2
  Top Layer w14: J4.1 R12.1 8743.76,3214.74 8743.76,3160.26 D7.1 8742.05,3160 8738.5,3156.45 R11.2@8738.5,3115
I2C_SDA: D8.1 J4.3 R9.1 R15.1 | length 279.3
  Top Layer w14: J4.3 8710,3015 8738.5,2986.5 R15.1 8786.5,2986.5 8798.5,2998.5 R9.1 D8.1@8800,2960.98
MOSREL: D9.2 K1.5 Q1.3 | length 642.8
  Top Layer w50: Q1.3 10073.66,3202.4 10171.89,3300.63 10237.2,3300.63 10247.64,3311.06 10247.64,3318.94 10527.91,3599.21 K1.5
NC: J7.3 K1.4 | length 241.9
  Top Layer w50: K1.4 10548.35,4089.09 10548.35,4138.35 J7.3
NetC5_1: C5.1 FB1.2 U2.3 | length 180.8
  Top Layer w30: U2.3 10251.73,2585.55 10280.28,2557 FB1.2@10323,2557 ; C5.1 FB1.2
NetC6_1: C6.1 U3.7 | length 68.3
  Top Layer w30: U3.7 10573.19,2944.53 10573.19,2883.31 C6.1@10575,2881.5
NetC6_2: C6.2 L1.1 U3.6 | length 171.5
  Top Layer w30: U3.6 10516.81,2944.53 10516.81,2883.31 C6.2 10513.5,2812.26 L1.1
NetC7_1: C7.1 U3.3 | length 71.2
  Top Layer w30: U3.3 C7.1
NetC16_1: C16.1 FB2.2 R18.2 U3.8 | length 496.2
  Top Layer w30: U3.8 10621.94,2945.77 10621.94,2886.56 FB2.2@10623.5,2885 ; U3.8@10623.19,2961.26 10635,2973.07 10635,3063.84 10666.16,3095 10770,3095 ; C16.1 10770,3148.31 10770,3095 ; R18.2 10850,3038.5 10850,3060 10815,3095 10770,3095
NetD1_4: D1.4 R1.2 | length 102.2
  Top Layer w12: R1.2@9365,3431.5 9371.69,3438.19 D1.4
NetD1_5: D1.5 R2.2 | length 99.4
  Top Layer w12: R2.2@9415,3431.5 D1.5
NetD1_6: D1.6 R3.2 | length 102.2
  Top Layer w12: D1.6 9458.31,3438.19 R3.2@9465,3431.5
NetD4_2: D4.2 J3.1 | length 194.8
  Top Layer w50: J3.1 10989.21,2813.11 11022.36,2846.26 D4.2
NetD12_1: D12.1 R21.1 | length 158.2
  Top Layer w12: R21.1@9515,3431.5 9515,3484.37 9586.69,3556.06 D12.1
NetD13_1: D13.1 R22.1 | length 103.1
  Top Layer w30: D13.1 9030.06,2791.75 9128.25,2791.75 R22.1
NetFB3_2: FB3.2 K1.2 | length 334.1
  Top Layer w50: FB3.2 10857.94,3375 11008.3,3525.36 11008.3,3596.29 K1.2
NetQ1_1: Q1.1 R13.1 R14.2 | length 127.6
  Top Layer w12: R13.1@10025,3000.16 Q1.1@10025,3127.76
NetR4_2: R4.2 U1.14 | length 409.5
  Top Layer w12: U1.14 9537.69,3013.74 9580.73,2970.7 9732.97,2970.7 9740,2977.73 9740,3032.97 9732.97,3040 9692.03,3040 9685,3047.03 9685,3088.5 R4.2
NetR5_2: R5.2 U1.15 | length 410.7
  Top Layer w12: U1.15 9543.46,3033.43 9588.19,2988.7 9667.97,2988.7 9675,2995.73 9675,3031.57 9654.49,3052.08 9654.49,3063.54 9653,3065.03 9653,3114.97 9668.03,3130 9682.97,3130 9690,3137.03 9690,3178.5 R5.2
NetR6_2: R6.2 U1.16 | length 409.1
  Top Layer w12: U1.16 9531.92,3053.11 9533.61,3051.43 9569.33,3051.43 9595.76,3025 9615,3025 9635,3045 9635,3161.66 9651,3177.66 9651,3256 9683.5,3288.5 R6.2
NetR7_2: R7.2 U1.17 | length 403.6
  Top Layer w12: U1.17 9555.09,3072.8 9603.35,3121.05 9603.35,3155.46 9633,3185.12 9633,3338 R7.2@9676.83,3381.83
NetR10_2: R10.2 U1.44 | length 70.1
  Top Layer w12: R10.2 9116.5,3051.5 9137.8,3072.8 U1.44
NetR12_2: R12.2 U1.42 | length 676.4
  Top Layer w14: R12.2 8806.5,3213.5 8854.39,3165.61 8859.39,3165.61 v1(8860.15,3164.85) ; v1(8907,3120) 8908.08,3120 8916.6,3111.48 9066.48,3111.48 9075,3120 9075,3131.6 9066.8,3139.8 9015.2,3139.8 8988.3,3166.7 8988.3,3178.3 9001.7,3191.7 9013.3,3191.7 9045,3160 9116.8,3160 9125,3151.8 9125,3135.23 9147.38,3112.85 9175.57,3112.85 U1.42
  Bottom Layer w14: v1(8860.15,3164.85) 8861.46,3163.54 8904.23,3120.77 8906.23,3120.77 v1(8907,3120)
NetR15_2: R15.2 U1.43 | length 677
  Top Layer w12: R15.2 8740.73,2923.5 8753.23,2911 8753.23,2896.77 8783.85,2866.15 8815.95,2866.15 v1(8817.1,2865) ; v1(8877.1,2865) 8877.1,3059.53 8910.05,3092.48 U1.43
  Bottom Layer w12: v1(8817.1,2865) v1(8877.1,2865)
NetR18_1: R18.1 R19.2 U3.1 | length 571.3
  Top Layer w30: U3.1 10620,3172.64 10623.19,3175.83 10633.54,3175.83 10656.72,3199 10735.88,3199 10766.88,3230 10881.43,3230 10930,3181.43 10930,3050 10922.5,3042.5 10916.5,3036.5 R18.1 ; R18.1@10930,3035 R19.2
NetR20_1: R20.1 U3.2 | length 101.9
  Top Layer w13: U3.2 10570,3179.02 10616.5,3225.52 10616.5,3228 R20.1
NO: J7.1 K1.3 | length 241.9
  Top Layer w50: J7.1 11001.65,4138.35 11001.65,4089.09 K1.3
NRST: C3.1 J2.4 R8.2 SW1.1 U1.7 | length 664.3
  Top Layer w10: J2.4 9334.09,2474.09 9363.31,2474.09 9374.06,2484.84 9374.06,2716.93 9336.5,2754.48 9336.5,2800 R8.2 9336.5,2886.5 9352.43,2902.43 9352.43,2934 U1.7
PA0: R13.2 U1.10 | length 823.6
  Top Layer w12: U1.10 9412.48,2908.21 9495.69,2825 9935,2825 10080.77,2970.77 10080.77,2989.27 R13.2
PA1: D11.1 R17.1 U1.11 | length 666.8
  Top Layer w12: R17.1 9121.5,3363.5 9153.85,3331.15 9173.85,3331.15 v1(9175,3330) D11.1 ; v1(9180.89,3282.9) 9217.32,3246.48 9217.32,3241.18 9279.78,3178.71 v1(9376.29,3178.71) ; v1(9423.71,3141.29) 9423.71,3139.71 9432.17,3131.26 U1.11
  Bottom Layer w12: v1(9175,3330) 9175,3290.41 9180.89,3284.52 v1(9180.89,3282.9) ; v1(9376.29,3178.71) 9377.43,3177.57 9387.43,3177.57 v1(9423.71,3141.29)
PA3: D10.1 R16.1 U1.13 | length 300.6
  Top Layer w12: U1.13 9528.41,2994.06 9528.41,2956.59 9620,2865 9660.52,2865 D10.1@9663.7,2868.17 ; D10.1 9730.69,2867.19 R16.1
PA8: J6.4 U1.29 | length 665.8
  Top Layer w12: J6.4 8935,3535 8950,3520 9185.98,3520 9253,3452.98 9253,3384.18 9260.03,3377.15 9303.94,3377.15 9373.11,3307.97 U1.29
PA12: J6.1 U1.33 | length 864.3
  Top Layer w12: J6.1 8765,3460 9169.61,3460 9196.84,3432.77 9196.84,3342.03 9215.73,3323.15 9273.43,3323.15 9294.37,3302.2 U1.33
PB0: J6.5 U1.18 | length 1617.9
  Top Layer w12: J6.5 9040,3595 9040,3640 9050,3650 9145,3650 9240,3745 9670,3745 9745,3670 9745,3525 9705,3485 9595,3485 9585,3475 9585,3375 9615,3345 9615,3192.57 9585.35,3162.92 9585.35,3128.51 9549.32,3092.48 U1.18
PB1: J6.6 U1.19 | length 1425
  Top Layer w12: J6.6 9270,3725 9660,3725 9727,3658 9727,3541.6 9695.4,3510 9580,3510 9560,3490 9560,3370 9597,3333 9597,3200.03 9567.35,3170.38 9567.35,3141.82 9537.69,3112.17 U1.19
PB12: R21.2 U1.25 | length 130
  Top Layer w12: U1.25 9451.85,3287.15 9511,3346.3 9511,3356 9523.5,3368.5 R21.2
PB13: R3.1 U1.26 | length 117.5
  Top Layer w12: U1.26 9432.17,3311.15 9461,3339.98 9461,3356 9473.5,3368.5 R3.1
PB14: R2.1 U1.27 | length 104.1
  Top Layer w12: U1.27 9412.48,3356 R2.1
PB15: R1.1 U1.28 | length 107.1
  Top Layer w12: R1.1 9376.5,3368.5 9389,3356 9389,3354.5 9392.8,3350.7 U1.28
PIR_SENSOR: J1.2 R17.2 | length 308.8
  Top Layer w12: J1.2 8920,3330 8930,3320 9012.93,3320 9106,3413.07 9106,3414 9118.5,3426.5 R17.2
RST: J5.2 R16.2 | length 90.3
  Top Layer w20: R16.2@9809.66,2865.98 9857.5,2865.98 9881.51,2890 J5.2@9890,2890
SPI_MISO: D3.1 J5.6 R6.1 R24.1 | length 341.3
  Top Layer w20: R6.1@9759.66,3285.98 9808,3285.98 9808.16,3286.14 D3.1@9808.16,3285.32 ; D3.1 9810,3287.64 9810.16,3287.8 J5.6@9887.8,3287.8 ; J5.6 9990,3380 9990,3408.5 R24.1
SPI_MOSI: D5.1 J5.7 R7.1 R26.1 | length 193.8
  Top Layer w20: R7.1@9759.66,3385.98 D5.1 R26.1 ; D5.1@9810,3387.64 9810.16,3387.8 9887.8,3387.8 J5.7@9890,3390
SPI_NSS: D6.1 J5.4 R4.1 | length 129.5
  Top Layer w20: R4.1@9759.66,3090.98 9808,3090.98 D6.1@9808.16,3090.83 ; D6.1 9810,3090.16 9810.16,3090 J5.4@9890,3090
SPI_SCK: D2.1 J5.5 R5.1 R25.1 | length 321.8
  Top Layer w20: R5.1@9759.66,3185.98 9808,3185.98 D2.1@9808.16,3185.83 ; D2.1 9810,3187.64 9810.16,3187.8 J5.5@9887.8,3187.8 ; J5.5 9983.5,3273.5 R25.1
SWCLK: J2.3 U1.37 | length 1816.7
  Top Layer w12: U1.37 9127.03,3210.59 9120,3203.56 9120,3187.03 9112.97,3180 9052.03,3180 9045,3187.03 9045,3247.97 9052.03,3255 9130,3255 9143.03,3268.03 9143.03,3277.97 9136,3285 9042.3,3285 8886,3128.7 8886,3095.54 8856.1,3065.65 8856.1,2580.97 9111.57,2325.5 9248.43,2325.5 9285.5,2325.5 J2.3
SWDIO: J2.2 U1.34 | length 1814.1
  Top Layer w12: U1.34 9274.69,3296.43 9265.97,3305.15 9030.15,3305.15 8868,3143 8868,3103 8838.1,3073.1 8838.1,2573.51 9104.11,2307.5 9367.5,2307.5 J2.2
UART_RX: J6.2 U1.31 | length 842.6
  Top Layer w12: J6.2 8735,3515.46 8767.84,3482.61 9172.45,3482.61 9215,3440.06 9215,3351.69 9225.55,3341.15 9289.03,3341.15 9333.74,3296.43 U1.31
UART_TX: J6.3 U1.30 | length 762.9
  Top Layer w12: J6.3 8835,3507.64 8842.03,3500.61 9179.91,3500.61 9235,3445.52 9235,3369.69 9245.55,3359.15 9296.48,3359.15 9353.43,3302.2 U1.30
pads on no net: U1.2 U1.3 U1.4 U1.5 U1.6 U1.12 U1.20 U1.21 U1.22 U1.32 U1.35 U1.36 U1.38 U1.39 U1.40 U1.41 U1.45 U1.46 U3.4

## Polygon pours and split planes (outlines as drawn)
GND on Bottom Layer "GND_BOTTOM" (solid, pour order 2): 8470,2260 11172.01,2260 11172.01,4365 10345,4365 10345,3780 8470,3780
GND on Top Layer "GND_TOP" (solid, pour order 1): 8470,2260 11172.01,2260 11172.01,4365 10345,4365 10345,3780 8470,3780

## Other copper
Top Layer:
  region net 3.3V_MCU: 9386.61,2904.94 9375.89,2894.22 ccw(c9390.11,2880) 9409.66,2875.26 ccw(c9377.22,2880) 9400.4,2903.18 9398.64,2904.94
  region net 3.3V_MCU: 9240.94,2958.15 9240.94,2987.22 cw(c9253.33,2987.22) 9244.57,2995.98 9214.66,2966.07 cw(c9200,2980.73) 9200,2960 cw(c9200,2935.86) 9217.07,2952.93 9230,2940
  region net 3.3V_MCU: 9196.37,2999.73 ccw(c9196.37,3026.72) 9215.46,3007.64 9205.08,2997.26 ccw(c9217.34,2985) 9200,2985
  region net 3.3V_MCU: 9386.76,2944.49 9386.76,2905.09 9386.61,2904.94 9398.64,2904.94 9398.64,2944.49
  region net 3.3V_MCU: 9105,2980 9105,2960 9170,2960 9170,2985

## Silkscreen, mask and mechanical layers (free items; w line width, h text height)
Top Overlay:
  drawing of 177 lines, arcs and shapes, not listed
  text "NC" at 10650,4325 h30
  text "COM" at 10740,4325 h30
  text "NO" at 10850,4325 h30
  text "RX" at 8745,3665 h30 r90
  text "TX" at 8850,3665 h30 r90
  text "PA8" at 8950,3660 h30 r90
  text "PB0" at 9050,3660 h30 r90
  text "PB1" at 9150,3660 h30 r90
  text "PA12" at 8645,3655 h30 r90
  text "GND" at 9250,3655 h30 r90
  text "MOSI" at 9980,3340 h30 r90
  text "3V3" at 8760,3300 h30
  text "DIN" at 8880,3300 h30
  text "GND" at 8995,3300 h30
  text "MISO" at 9980,3220 h30 r90
  text "SCL" at 8515,3180 h30 r90
  text "SCK" at 9980,3130 h30 r90
  text "3V3" at 8515,3080 h30 r90
  text "CS" at 9980,3055 h30 r90
  text "SDA" at 8515,2975 h30 r90
  text "GND" at 9980,2945 h30 r90
  text "GND" at 8515,2875 h30 r90
  text "RST" at 9980,2840 h30 r90
  text "3V3" at 9980,2735 h30 r90
  text "Designed by:" at 8510,2500 h30
  text "Electronic" at 10425,2455 h30
  text "Johan Mendieta" at 8510,2420 h30
  text "Design" at 10425,2395 h30
  text "GND" at 9060,2280 h30
  text "NRST" at 9175,2280 h30
  text "CLK" at 9305,2280 h30
  text "DIO" at 9405,2280 h30
  text "3V3" at 9505,2280 h30
Bottom Overlay:
  text "http://bit.ly/3PmNbTl" at 10675,2745 h60
BoardShape:
  the board outline again, w10

## Text inside footprints (layer, text, board x,y; h text height)
D12: Top Overlay "+" at 9515,3535 h35
D13: Top Overlay "+" at 9100,2815 h35 r180